# Altium PCB Osiris.PcbDoc
Units mm, origin at the board's own origin, x right, y up, seen from the top; angles counter-clockwise.
Board outline 27.4 x 49.88 mm, 2 copper layers (Top Layer, Bottom Layer), stack 1.671 mm thick; 46 components, 44 nets, 177 pads, 46 vias.
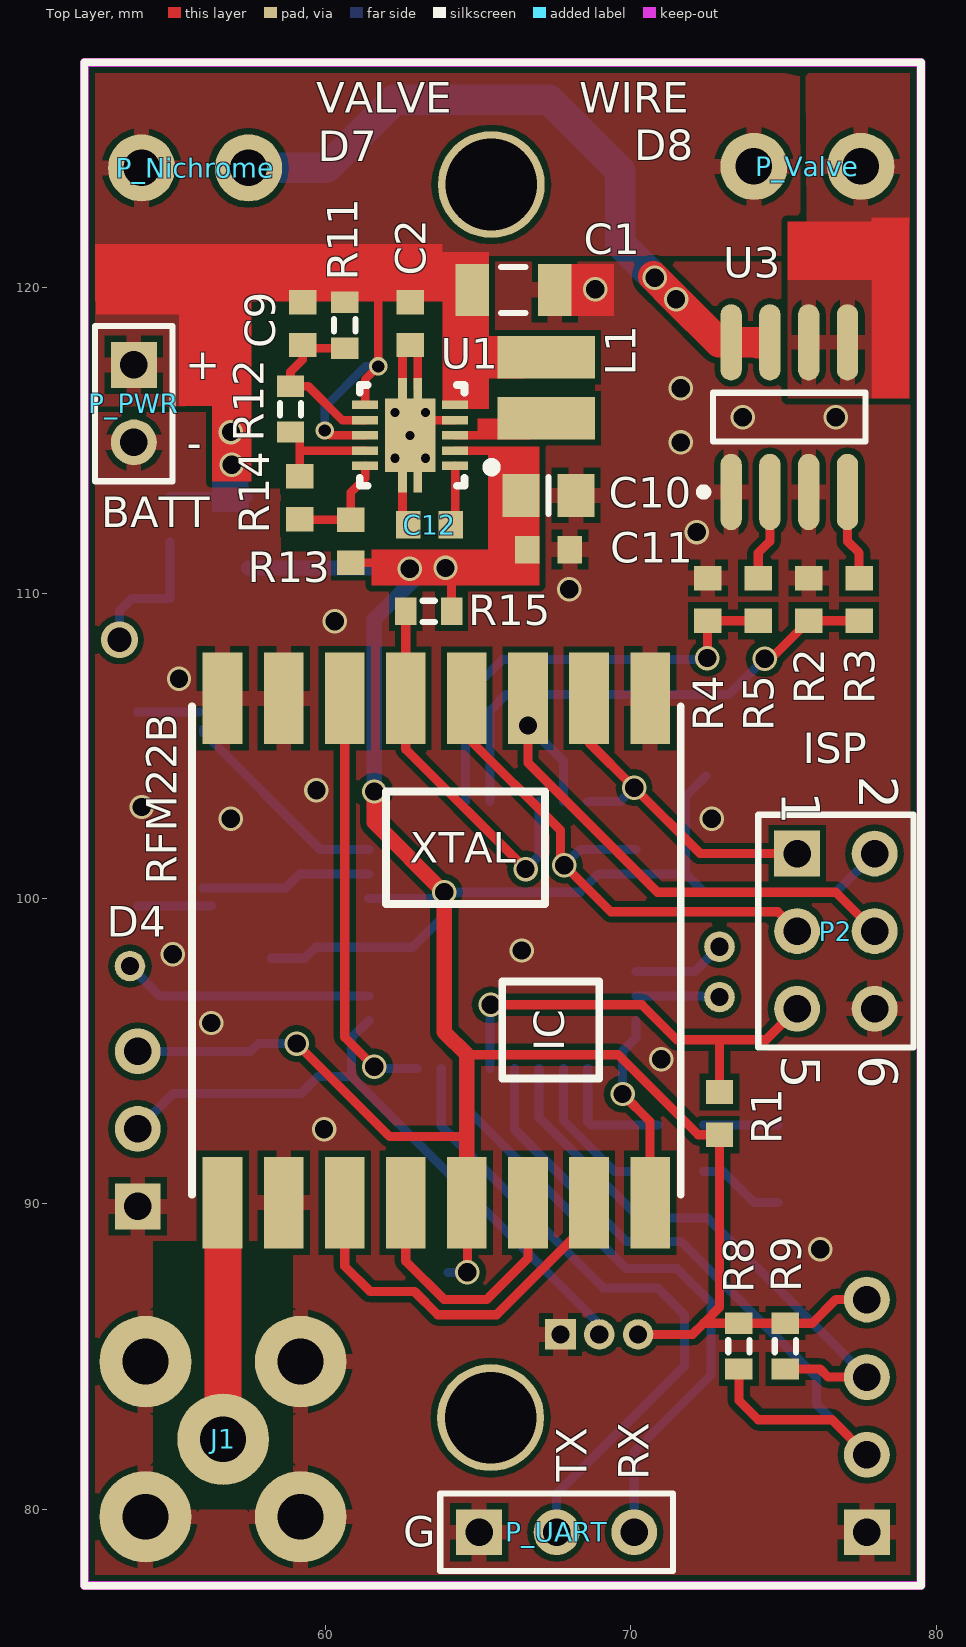
[diagram p0: Top Layer view]
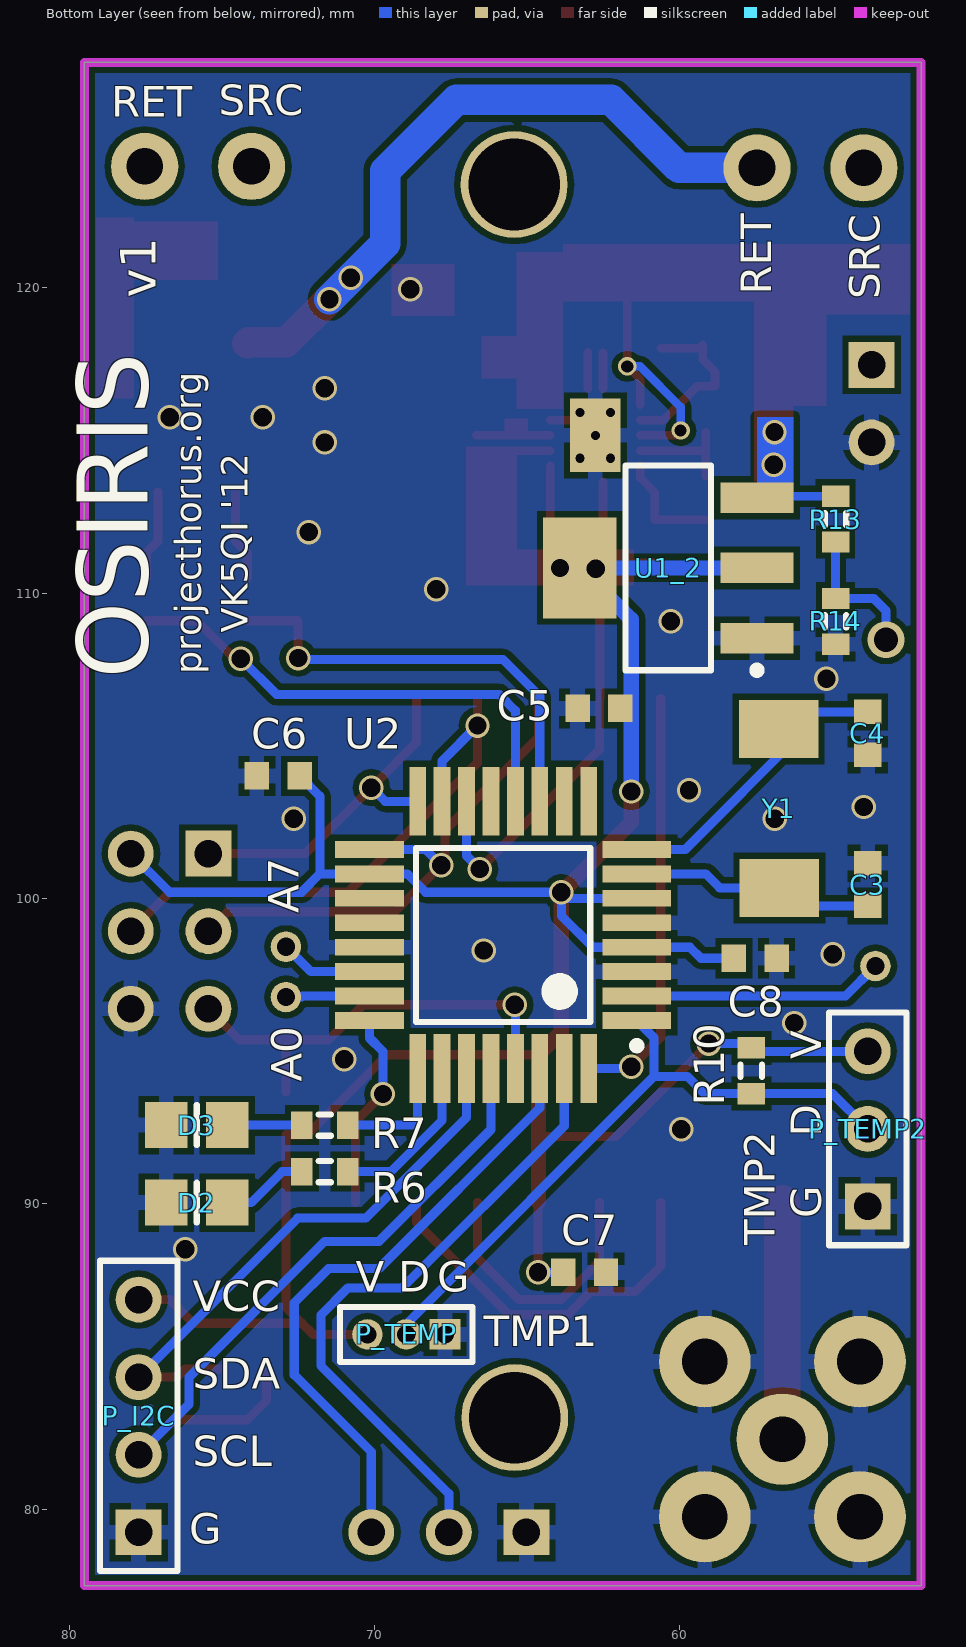
[diagram p1: Bottom Layer view, seen from below]

## Layer stack, top to bottom
Top Layer: signal copper 0.0356
Dielectric: core 1.6, FR-4, Dk 4.8
Bottom Layer: signal copper 0.0356

## Board outline
52.1,77.5 52.1,127.381 79.5,127.381 79.5,77.5

## Design rules (kind name [scope] priority, off if disabled: settings)
Clearance [All] p1: gap=0.2
ComponentClearance [All] p1 off: gap=0.254 collisioncheckmode=3 verticalgap=0.254 showdistances=FALSE
PolygonConnect PolygonConnect_1 [IsVia] p1: connectstyle=Direct reliefconductorwidth=0.254 reliefentries=4 polygonreliefangle="90 Angle"
PolygonConnect [All] p2: connectstyle=Relief reliefconductorwidth=0.5 reliefentries=4 polygonreliefangle="90 Angle"
RoutingVias [All] p1: holewidth=0.6 width=0.8 viastyle="Through Hole" minholewidth=0.711 minwidth=1.27 maxholewidth=0.711 maxwidth=1.27
SilkscreenOverComponentPads [All] p1: minsilkscreentomaskgap=0.254
SolderMaskExpansion [All] p1: expansion=0.102
Width [All] p1: maxlimit=5 minlimit=0.2 preferedwidth=0.2
26 further rules are at their usual default settings.

## Classes and differential pairs
component class Osiris: C1 C2 C3 C4 C5 C6 C7 C8 C9 C10 C11 C12 D1 D2 D3 J1 L1 P2 P_I2C P_Nichrome P_PWR P_TEMP P_TEMP2 P_UART P_Valve R1 R2 R3 R4 R5 R6 R7 R8 R9 R10 R13 R14 R15 U1 U1_2 U2 U3 Y1

## Components (designator, comment, footprint, x,y, rotation, side; value= is the part's Value field where it differs from the comment)
C1 "10V" C1206 66.15,119.925 r180 top
C2 "Cap Semi" 1608[0603] 62.775,118.825 r90 top
C3 "C0805" 1608[0603] 53.848,100.457 r270 bottom
C4 "C0805" 1608[0603] 53.848,105.41 r90 bottom
C5 "Cap Semi" 1608[0603] 62.65,106.225 r180 bottom
C6 "Cap Semi" 1608[0603] 73.152,104.013 r180 bottom
C7 "Cap Semi" 1608[0603] 63.119,87.757 r0 bottom
C8 "Cap Semi" 1608[0603] 57.531,98.044 r0 bottom
C9 "Cap Semi" 1608[0603] 59.25,118.825 r90 top
C10 "6.3V" 6-0805_N 67.3,113.2 r180 top
C11 "Cap Semi" 1608[0603] 67.3,111.425 r180 top
C12 "Cap Semi" 1608[0603] 63.402,112.246 r0 top
D2 "LED0" 6-0805_M 75.819,90.043 r0 bottom
D3 "LED0" 6-0805_M 75.819,92.583 r0 bottom
J1 "SMA_R" "CON SMA PCB 90" 56.642,82.296 r180 top
L1 "ELLVGG2R2N" ELLVGG 67.225,116.725 r90 top
P2 "ISP" HDR2X3 75.438,101.473 r270 top
P_I2C "Header 4" HDR1X4 77.724,79.248 r90 bottom
P_Nichrome "Header 2" MOLEX_Terminal_Block 53.975,123.925 r0 top
P_PWR "Header 2" HDR1X2 53.721,117.475 r270 top
P_TEMP "MHDR1X3" MHDR1X3 67.691,85.725 r0 bottom
P_TEMP2 "Header 3" HDR1X3 53.848,89.916 r90 bottom
P_UART "Header 3" HDR1X3 65.024,79.248 r0 top
P_Valve "Header 2" MOLEX_Terminal_Block 74.025,123.975 r0 top
R1 "Res3" 1608[0603] 72.898,92.964 r270 top
R2 "Res3" 1608[0603] 75.819,109.794 r270 top
R3 "Res3" 1608[0603] 77.47,109.794 r270 top
R4 "Res3" 1608[0603] 72.517,109.794 r90 top
R5 "Res3" 1608[0603] 74.168,109.794 r90 top
R6 "Res3" J1-0603 71.628,91.059 r0 bottom
R7 "Res3" J1-0603 71.628,92.583 r0 bottom
R8 "Res3" J1-0603 73.533,85.344 r270 top
R9 "Res3" J1-0603 75.057,85.344 r270 top
R10 "Res3" J1-0603 57.658,94.361 r270 bottom
R11 "Res3" J1-0603 60.625,118.775 r90 top
R12 "Res3" J1-0603 58.85,116.025 r90 top
R13 "Res3" J1-0603 54.9,112.425 r90 bottom
R13 "Res3" 1608[0603] 60.825,111.7 r270 top
R14 "Res3" J1-0603 54.9,109.075 r270 bottom
R14 "Res3" 1608[0603] 59.15,113.125 r270 top
R15 "Res3" J1-0603 63.375,109.4 r0 top
U1 "TPS61202" TPS61200 62.767,115.167 r270 top
U1_2 "LM1117IMP-3.3" MP04A_N 60.375,110.825 r0 bottom
U2 "ATMega328P" TQFP32 65.786,98.806 r0 bottom
U3 "FDS9926A" SO8_M 75.184,115.763 r90 top
Y1 "8MHz" ABM3_XTAL 56.642,104.648 r270 bottom

## Footprints (in the part's own frame and the unit in brackets; to place one, negate y for a bottom-side part, rotate by r counter-clockwise, add the part's x,y. Pads: shape width x height; smd on the part's side, far side on the other; paste and mask are expansions set on the pad)
6-0805_M [mm] "Chip Resistor, Body 2.0x1.2mm, IPC Low Density"
  rect 1.4x1.5 smd: 1(-1,0) 2(1,0)
  silkscreen extent 0,-0.65 0,0.65, body extent -1.07,-0.7 1.07,0.7, height 0.7
6-0805_N [mm] "Chip Resistor, Body 2.0x1.2mm, IPC Medium Density"
  rect 1.2x1.4 smd: 1(-0.9,0) 2(0.9,0)
  silkscreen extent 0,-0.6 0,0.6, body extent -1.07,-0.7 1.07,0.7, height 0.7
1608[0603] [mm] "Chip Capacitor, Body 1.6x0.8mm, IPC High Density"
  rect 0.8x0.9 smd: 1(-0.7,0) 2(0.7,0)
  body extent -0.87,-0.48 0.87,0.48, height 1.3
ABM3_XTAL [mm]
  rect 1.9x2.6 smd: 1(-0.9,-0.125) 2(4.3,-0.1)
  body extent -1.4,-1.95 4.8,1.75, height 1.34
C1206 [mm] "Chip Capacitor, Body 3.2x1.6mm, IPC High Density"
  rect 1.1x1.7 smd: 1(-1.35,0) 2(1.35,0)
  silkscreen extent -0.4,-0.75 0.4,0.75, body extent -1.7,-0.9 1.7,0.9, height 1.3
"CON SMA PCB 90" [mm] "UofA Lib Pavel"
  round 3 hole 1.5: 1(0,0) 2(-2.54,2.54) 2(-2.54,-2.54) 2(2.54,2.54) 2(2.54,-2.54)
ELLVGG [mm]
  rect 1.4x3.2 smd: 1(1,0) 2(-1,0)
HDR1X2 [mm] "Connector; Header; 2 Position"
  rect 1.5x1.5 hole 0.9: 1(0,0)
  round 1.5 hole 0.9: 2(2.54,0)
  silkscreen extent -1.27,-1.27 3.81,1.27
HDR1X3 [mm] "Connector; Header; 3 Position"
  rect 1.5x1.5 hole 0.9: 1(0,0)
  round 1.5 hole 0.9: 2(2.54,0) 3(5.08,0)
  silkscreen extent -1.27,-1.27 6.35,1.27
HDR1X4 [mm] "Connector; Header; 4 Position"
  rect 1.5x1.5 hole 0.9: 1(0,0)
  round 1.5 hole 0.9: 2(2.54,0) 3(5.08,0) 4(7.62,0)
  silkscreen extent -1.27,-1.27 8.89,1.27
HDR2X3 [mm] "Connector; Header; 3x2 Position"
  rect 1.5x1.5 hole 0.9: 1(0,0)
  round 1.5 hole 0.9: 2(0,2.54) 3(2.54,0) 4(2.54,2.54) 5(5.08,0) 6(5.08,2.54)
  silkscreen extent -1.27,-1.27 6.35,3.81
J1-0603 [mm] "Chip Resistor, Body 1.6x0.8mm, IPC High Density"
  rect 0.7x0.9 smd: 1(-0.75,0) 2(0.75,0)
  silkscreen extent -0.2,-0.35 0.2,0.35, body extent -0.85,-0.48 0.85,0.48, height 0.9
MHDR1X3 [mm] "Connector; Header; 3 Position"
  rect 1x1 hole 0.6: 1(0,0)
  round 1 hole 0.6: 2(1.27,0) 3(2.54,0)
  silkscreen extent -0.9,-0.9 3.44,0.9
MOLEX_Terminal_Block [mm]
  round 2.2 hole 1.2: 1(0,0) 2(3.5,0)
  body extent -1.78,-3.77 5.33,3.52, height 8.51
MP04A_N [mm] "SOT223, 4-Leads, Body 6.5x3.5mm, Pitch 2.3mm, Lead Span 7mm, IPC Medium Density"
  rect 2.4x1 smd: 1(-2.9,2.3) 2(-2.9,0) 3(-2.9,-2.3)
  rect 2.4x3.3 smd: 4(2.9,0)
  silkscreen extent -3.02,-3.35 1.4,3.47, body extent -1.85,-3.35 1.85,3.35, height 1.8
SO8_M [mm] "SOIC, 8-Leads, Body 4.9x3.9mm, Pitch 1.27mm, IPC Low Density"
  oval 2.5x0.7 smd: 1(-2.45,1.905) 2(-2.45,0.635) 3(-2.45,-0.635) 4(-2.45,-1.905) 5(2.45,-1.905) 6(2.45,-0.635) 7(2.45,0.635) 8(2.45,1.905)
  silkscreen extent -2.57,-2.5 0.8,2.93, body extent -2,-2.5 2,2.5, height 1.75
TPS61200 [mm]
  rect 0.7x0.28 smd: 0(-1.524,-0.25) 0(-1.524,0.25) 0(1.524,-0.25) 0(1.524,0.25)
  rect 2.4x1.65 smd: 0(0,0)
  rect 2.4x1.65 smd far side: 0(0,0)
  rect 0.28x0.85 smd: 1(1,1.475) 2(0.5,1.475) 3(0,1.475) 4(-0.5,1.475) 5(-1,1.475) 6(-1,-1.475) 7(-0.5,-1.475) 8(0,-1.475) 9(0.5,-1.475) 10(1,-1.475)
  silkscreen extent -1.65,-1.65 1.65,2.77
TQFP32 [mm] "TQFP, 32-Leads, Body 7.3x9.3mm (max), Pitch 0.80mm, IPC Medium Density"
  rect 2.25x0.55 smd: 1(-4.375,2.8) 2(-4.375,2) 3(-4.375,1.2) 4(-4.375,0.4) 5(-4.375,-0.4) 6(-4.375,-1.2) 7(-4.375,-2) 8(-4.375,-2.8) 17(4.375,-2.8) 18(4.375,-2) 19(4.375,-1.2) 20(4.375,-0.4) 21(4.375,0.4) 22(4.375,1.2) 23(4.375,2) 24(4.375,2.8)
  rect 0.55x2.25 smd: 9(-2.8,-4.375) 10(-2,-4.375) 11(-1.2,-4.375) 12(-0.4,-4.375) 13(0.4,-4.375) 14(1.2,-4.375) 15(2,-4.375) 16(2.8,-4.375) 25(2.8,4.375) 26(2,4.375) 27(1.2,4.375) 28(0.4,4.375) 29(-0.4,4.375) 30(-1.2,4.375) 31(-2,4.375) 32(-2.8,4.375)
  silkscreen extent -4.5,-2.85 2.85,3.75, body extent -3.5,-3.5 3.5,3.5, height 1.2

## Part data
C1 C10: library part "Cap Semi", "Capacitor (Semiconductor SIM Model)"
C2 C5 C6 C7 C8 C9 C11 C12: "Capacitor (Semiconductor SIM Model)"
C3 C4: "Ceramic Chip Capacitor - Standard"
D2 D3: "Typical INFRARED GaAs LED"
J1: "Power Connector"
L1: library part Inductor, "Inductor"
P2: library part "Header 3X2", "Header, 3-Pin, Dual row"
P_I2C: "Header, 4-Pin"
P_Nichrome P_PWR P_Valve: "Header, 2-Pin"
P_TEMP P_TEMP2 P_UART: "Header, 3-Pin"
R1 R2 R3 R4 R5 R6 R7 R8 R9 R10 R11 R12 R13 R13 R14 R14 R15: "Resistor"
U1: library part TPS61200
U1_2: "800mA Low-Dropout Linear Regulator, 4-pin SOT-223"
Y1: library part ECS-110-S-1, "Crystal Oscillator"

## Free pads (board coordinates)
  round 1 hole 0.6: 0(72.898,96.774) 1(72.898,98.425) 2(53.594,97.79)
  rect 1.3x3 smd: 1(56.626,90.043) 2(58.626,90.043) 3(60.626,90.043) 4(62.626,90.043) 5(64.626,90.043) 6(66.626,90.043) 7(68.626,90.043) 8(70.626,90.043) 9(70.626,106.553) 10(68.626,106.553) 11(66.626,106.553) 12(64.626,106.553) 13(62.626,106.553) 14(60.626,106.553) 15(58.626,106.553) 16(56.626,106.553)
  round 3.5 hole 3: 3(65.405,83) 3(65.425,123.381)

## Via types
v1: diameter 0.8, hole 0.6, Top Layer to Bottom Layer, tented both sides, 35 vias
v2: diameter 0.4, hole 0.3, Top Layer to Bottom Layer, 5 vias
v3: diameter 0.8, hole 0.6, Top Layer to Bottom Layer, 2 vias
v4: diameter 0.6, hole 0.4, Top Layer to Bottom Layer, tented both sides, 2 vias
v5: diameter 1.2, hole 0.8, Top Layer to Bottom Layer, 1 vias
v6: diameter 0.8, hole 0.6, Top Layer to Bottom Layer, tented bottom, 1 vias

## Nets (pads, with @x,y where several pads share a name; then routed paths per layer and width w, separated by ;. In a path a pad name is that pad's centre, name@x,y a point inside that pad or via, vN(x,y) a via of type N, cw(c..) or ccw(c..) an arc to the next point about the centre after c; other vN are vias at no path point)
ADC6: U2.19
ADC7: pad.1@72.898,98.425 U2.22 | length 3.1
  Bottom Layer w0.3: U2.22 72.079,97.606 pad.1@72.898,98.425
GND: C1.1 C2.1 C3.1 C4.1 C5.1 C6.1 C7.1 C8.1 C10.1 C11.1 C12.1 D2.2 D3.2 J1.2 P2.6 P_I2C.1 P_PWR.2 P_TEMP2.1 P_TEMP.1 P_UART.1 pad.2@58.626,90.043 pad.9 pad.15 pad.16 R2.1 R4.2 R14.2@54.9,108.325 U1.0 U1.4 U1_2.1 U2.3 U2.5 U2.21 U3.1 U3.3 | length 4.6
  Top Layer w0.28: C12.1@62.517,112.431 U1.0@62.517,113.643 ; U1.0@62.517,116.691 C2.1@62.517,117.867 ; U1.0@63.017,116.691 C2.1@63.017,117.883 ; U1.0@63.267,115.667 U1.4
  other v1: 76.2,88.519 59.95,92.45 70.993,94.742 56.25,95.925 54.991,98.171 66.421,98.298 56.896,102.616 72.644,102.616 53.975,102.997 59.7,103.55 55.2,107.2 60.3,109.075 67.975,110.125 72.15,112 71.628,114.935 73.66,115.763 76.708,115.763 71.628,116.713 68.825,119.95
  other v2: 62.267,114.417 63.267,114.417 62.767,115.167 62.267,115.917 63.267,115.917
NetC9_1: C9.1 R11.1 R12.2 U1.7 | length 5.8
  Top Layer w0.28: R11.1 59.35,118.025 C9.1 59.25,117.65 58.85,117.25 R12.2 59.43,116.775 60.538,115.667 U1.7
NetC12_2: C12.2 U1.1 | length 1.8
  Top Layer w0.28: C12.2@64.242,112.386 U1.1
NetD2_1: D2.1 R6.2 | length 2.9
  Bottom Layer w0.3: R6.2 73.025,91.059 74.041,90.043 D2.1
NetD3_1: D3.1 R7.2 | length 2.4
  Bottom Layer w0.3: R7.2 D3.1
NetJ1_1: J1.1 pad.1@56.626,90.043 | length 7.8
  Top Layer w1: pad.1@56.626,90.043 pad.1@56.642,90.027
  Top Layer w1.2: J1.1 pad.1@56.642,90.027
NetL1_2: L1.2 U1.3 | length 2.4
  Top Layer w0.28: U1.3 L1.2@66.667,115.167
NetP_Nichrome_2: P_Nichrome.2 U3.7 U3.8 | length 23.4
  Top Layer w1: v1@70.725,120.375 v1(71.475,119.625) 72.887,118.213 U3.8 74.131,118.213 74.168,118.176
  Bottom Layer w1: P_Nichrome.2 60.025,123.925 62.25,126.15 67.325,126.15 69.65,123.825 69.65,121.45 v1(71.475,119.625)
  other v1: 70.775,120.325
NetP_Valve_2: P_Valve.2 U3.5 U3.6
NetR3_1: R3.1 U3.4 | length 3
  Top Layer w0.3: U3.4 77.089,111.699 77.47,111.318 R3.1
NetR5_2: R5.2 U3.2 | length 3
  Top Layer w0.3: R5.2 74.168,111.318 74.549,111.699 U3.2
NetR12_1: R12.1 R14.1@59.15,113.825 U1.9 | length 3.6
  Top Layer w0.28: R14.1@59.15,113.825 R12.1@59.15,115.275 ; 59.183,114.667 U1.9
NetR13_1: R13.1@54.9,111.675 R14.1@54.9,109.825 | length 4.6
  Bottom Layer w0.3: v5(53.25,108.475) 53.25,109.425 53.65,109.825 54.9,109.825 R13.1@54.9,111.675
NetR13_1: R13.1@60.825,112.4 R14.2@59.15,112.425 U1.10 | length 3.6
  Top Layer w0.28: R14.2@59.175,112.4 60.825,112.4 60.825,113.3 61.292,113.767 U1.10
NetU5_3: pad.3@60.626,90.043 pad.7 | length 12.6
  Top Layer w0.3: pad.3@60.626,90.043 60.626,87.964 61.46,87.13 62.912,87.13 63.674,86.368 65.596,86.368 68.626,89.398 pad.7
NetU5_4: pad.4 pad.6 | length 8.8
  Top Layer w0.3: pad.4 62.626,88.123 63.881,86.868 65.278,86.868 66.626,88.216 pad.6
PB0: R2.2 R3.2 U2.12 | length 16.3
  Top Layer w0.3: v1(74.375,107.85) 74.575,107.85 R2.2 R3.2
  Bottom Layer w0.3: U2.12 65.386,106.153 65.913,106.68 73.205,106.68 v1(74.375,107.85)
PB1: U2.13
PB2: pad.13 R15.1 U2.14 | length 12.5
  Top Layer w0.3: R15.1 pad.13 pad.13 62.626,104.887 v1(66.548,100.965)
  Bottom Layer w0.3: v1(66.548,100.965) 66.986,101.403 U2.14
PB3/MOSI: P2.4 pad.11 U2.15 | length 18.7
  Top Layer w0.3: pad.11 v6(66.626,105.664) 66.626,104.443 70.866,100.203 76.708,100.203 P2.4
  Bottom Layer w0.3: v6(66.626,105.664) 67.786,104.504 U2.15
PB4/MISO: P2.1 pad.10 U2.16 | length 11.5
  Top Layer w0.3: pad.10 68.626,105.11 v1(70.104,103.632) 72.263,101.473 P2.1
  Bottom Layer w0.3: U2.16 69.653,103.181 v1(70.104,103.632)
PB5/SCK: P2.3 pad.12 U2.17 | length 17.9
  Top Layer w0.3: pad.12 64.626,105.3 67.691,102.235 67.691,101.219 v1(67.818,101.092) 69.342,99.568 74.803,99.568 P2.3
  Bottom Layer w0.3: v1(67.818,101.092) 68.326,101.6 70.155,101.6 U2.17 U2.17@70.167,101.6
PC0: pad.0 U2.23 | length 2.2
  Bottom Layer w0.3: U2.23 72.358,96.806 72.39,96.774
PC1: pad.8 U2.24 | length 6.5
  Top Layer w0.3: v1(69.723,93.599) 70.626,92.696 pad.8
  Bottom Layer w0.3: v1(69.723,93.599) 69.723,94.996 70.161,95.434 U2.24
PC2: R7.1 U2.25 | length 4.1
  Bottom Layer w0.3: U2.25 68.586,92.704 68.707,92.583 R7.1
PC3: R6.1 U2.26 | length 5.5
  Bottom Layer w0.3: U2.26 67.786,92.742 69.469,91.059 R6.1
PC4: P_I2C.3 R9.2 U2.27 | length 18.6
  Top Layer w0.3: R9.2 76.188,84.594 76.454,84.328 P_I2C.3
  Bottom Layer w0.3: U2.27 66.984,94.429 66.984,92.837 70.286,89.535 72.517,89.535 P_I2C.3
PC5: P_I2C.2 R8.2 U2.28 | length 24.4
  Top Layer w0.3: R8.2 73.533,83.566 74.168,82.931 76.581,82.931 P_I2C.2
  Bottom Layer w0.3: U2.28 66.186,92.437 69.85,88.773 71.628,88.773 76.073,84.328 76.073,83.439 P_I2C.2
PD0: P_UART.3 U2.30 | length 20.5
  Bottom Layer w0.3: U2.30 64.586,93.148 69.85,87.884 71.501,87.884 72.625,86.76 72.625,84.4 70.104,81.879 P_UART.3
PD1: P_UART.2 U2.31 | length 21.3
  Bottom Layer w0.3: U2.31 63.786,92.551 69.088,87.249 70.866,87.249 71.755,86.36 71.755,84.705 67.564,80.514 P_UART.2
PD2: pad.14 U2.32 | length 13.9
  Top Layer w0.3: pad.14 60.626,95.457 v1(61.595,94.488)
  Bottom Layer w0.3: v1(61.595,94.488) 61.652,94.431 U2.32
PD3: P_TEMP2.2 P_TEMP.2 R10.2 U2.1 | length 21.6
  Bottom Layer w0.3: P_TEMP2.2 55.003,93.611 58.42,93.611 59.194,93.611 59.76,94.177 60.845,94.177 ; U2.1 60.845,95.44 60.845,94.177 ; P_TEMP.2 68.961,86.061 60.845,94.177
PD4: pad.2@53.594,97.79 U2.2 | length 8.2
  Bottom Layer w0.3: pad.2@53.594,97.79 54.578,96.806 U2.2
PD5: U2.9
PD6: U2.10
PD7: R4.1 R5.1 U2.11 | length 14.7
  Top Layer w0.3: v1(72.5,107.875) 72.5,109.077 R4.1 R5.1
  Bottom Layer w0.3: U2.11 64.586,106.623 65.786,107.823 v1@72.448,107.823
RST: P2.5 R1.1 U2.29 | length 14.7
  Top Layer w0.3: v1(65.405,96.52) 70.358,96.52 71.501,95.377 72.898,95.377 ; R1.1 72.898,95.377 ; P2.5 74.422,95.377 72.898,95.377
  Bottom Layer w0.3: U2.29 65.386,96.501 v1(65.405,96.52)
V_BATT: C1.2 C2.2 C9.2 L1.1 P_Nichrome.1 P_PWR.1 P_Valve.1 R11.2 R13.2@54.9,113.175 U1.5 U1.6 U1.8 U1_2.3 | length 10.9
  Top Layer w0.28: v4(59.975,115.325) 60.133,115.167 U1.8 ; U1.6 61.292,116.992 v4(61.725,117.425) 61.725,119.8
  Bottom Layer w0.28: R13.2@54.9,113.175 57.425,113.175 U1_2.3 ; v4(59.975,115.325) 59.975,116.1 61.3,117.425 v4(61.725,117.425)
  other v1: 56.925,114.2 56.9,115.275
V_REF: U2.20
VCC: C5.2 C6.2 C7.2 C8.2 C10.2 C11.2 P2.2 P_I2C.4 P_TEMP2.3 P_TEMP.3 pad.5 R1.2 R8.1 R9.1 R10.1 R13.2@60.825,111 R15.2 U1.2 U1_2.2 U1_2.4 U2.4 U2.6 U2.18 | length 99.2
  Top Layer w0.28: R13.2@60.825,111 62.15,111 ; U1.2 65.492,114.667
  Top Layer w0.3: v1(59.055,95.25) 62.103,92.202 64.626,92.202 64.688,92.264 ; R15.2 64.125,110.475 ; pad.5 64.643,90.026 v1(64.643,87.757) ; 64.626,94.886 69.579,94.886 72.201,92.264 R1.2 72.898,86.614 72.378,86.094 ; P_TEMP.3 72.009,85.725 72.378,86.094 ; P_I2C.4 76.708,86.868 75.934,86.094 R9.1 R8.1 72.378,86.094
  Top Layer w0.5: v1(61.595,103.505) 61.595,102.489 v1(63.881,100.203) 63.881,95.631 64.626,94.886 64.626,92.202 pad.5
  Bottom Layer w0.3: P_TEMP2.3 57.543,94.996 R10.1 57.797,95.25 v1(59.055,95.25) ; C8.2 59.309,98.044 59.671,98.406 U2.4 62.846,98.406 63.881,99.441 v1(63.881,100.203) ; U2.6 63.684,100.006 v1(63.881,100.203) ; C7.2@64.008,87.757 v1(64.643,87.757) ; C6.2 71.787,103.348 71.787,100.806 ; P2.2 76.708,100.203 73.025,100.203 72.39,100.203 71.787,100.806 ; v1(63.881,100.203) 68.326,100.203 68.929,100.806 U2.18 71.787,100.806
  Bottom Layer w0.5: U1_2.2 U1_2.4 61.595,109.145 v1(61.595,103.505)
  other v3: 62.75,110.8 63.925,110.825
XTAL1: C3.2 U2.7 Y1.2 | length 8
  Bottom Layer w0.3: C3.2 Y1.2@56.261,99.757 ; Y1.2@55.98,100.348 58.692,100.348 59.15,100.806 U2.7
XTAL2: C4.2 U2.8 Y1.1 | length 9.1
  Bottom Layer w0.3: C4.2 Y1.1@55.88,106.11 ; Y1.1@56.005,105.548 56.005,105.424 59.823,101.606 U2.8

## Polygon pours and split planes (outlines as drawn)
GND on Bottom Layer "Top Layer-No Net" (solid, pour order 17): 79.5,127.381 52.1,127.381 52.1,77.594 52.1,77.5 79.5,77.5
GND on Top Layer "Top Layer-No Net" (solid, pour order 15): 52.1,127.381 52.1,77.5 79.5,77.5 79.5,127.381
V_BATT on Top Layer "Top Layer-No Net 1" (solid, pour order 9): 52.45,121.05 52.45,121.505 52.45,122.847 52.45,127.381 75.844,127.381 75.85,127.375 75.85,123.134 75.85,121.05
V_BATT on Top Layer "Top Layer-No Net 1" (solid, pour order 10): 52.3,116.125 52.3,119.125 55.4,119.125 55.4,116.125
NetP_Valve_2 on Top Layer "Top Layer-No Net 1" (solid, pour order 7): 75.125,116.375 75.125,120.25 77.875,120.25 77.875,116.375
NetP_Valve_2 on Top Layer "Top Layer-No Net 1" (solid, pour order 8): 75.725,127.125 79.125,127.125 79.125,122.125 75.75,122.125

## Keep-outs
Keep-Out Layer:
  the board outline again, w0.3

## Other copper
Top Layer:
  rectangle net NetP_Valve_2: 75.125,120.25 78.1,122.175
  rectangle net NetP_Valve_2: 77.875,116.375 79.125,122.3
  rectangle net GND: 67.375,119.075 69.45,120.775
  rectangle net V_BATT: 52.457,119.125 56.075,120.65
  rectangle net V_BATT: 56.275,113.65 57.575,116.2
  rectangle net VCC: 61.5,110.25 65.475,111.425
  rectangle net VCC: 65.325,110.25 67,114.8
  rectangle net NetL1_2: 64.975,115.025 65.75,115.725
  rectangle net V_BATT: 55.2,116.125 57.575,119.65
  rectangle net V_BATT: 52.45,119.55 63.825,121.425
  rectangle net V_BATT: 64.675,117.025 66.5,118.425
  rectangle net V_BATT: 63.825,116.025 65.35,121.175
  pour cut-out: 57.575,113.446 57.596,113.425 61.8,113.425 61.8,119.25 61.65,119.4 57.55,119.4
  pour cut-out: 58.525,111.35 58.525,114.9 64.275,114.9 64.4,114.775 64.4,111.35
  pour cut-out: 65.625,116.425 65.625,117.025 68.825,117.025 68.825,116.425
  pour cut-out: 54.352,80.006 54.356,80.01 54.356,88.773 58.928,88.773 58.932,88.769 58.932,80.006
Bottom Layer:
  rectangle net V_BATT: 56.275,112.65 57.475,115.775
  pour cut-out: 71.501,89.535 72.517,89.535 77.216,84.963 77.231,82.662 77.47,82.423 76.962,82.423 76.962,82.55 76.073,83.439 76.073,84.328 71.628,88.773
  pour cut-out: 61.931,93.091 61.988,93.148 64.586,93.148 69.85,87.884 71.501,87.884 72.816,86.569 68.453,86.569

## Silkscreen, mask and mechanical layers (free items; w line width, h text height)
Top Overlay:
  lines w0.254: 55.626,90.297 55.626,106.297 ; 71.626,90.297 71.626,106.297 ; 52.1,77.5 79.5,77.5 79.5,127.381 52.1,127.381 52.1,77.5 ; 61.976,99.822 61.976,103.505 67.183,103.505 67.183,99.822 61.976,99.822 ; 65.786,94.107 65.786,97.282 68.961,97.282 68.961,94.107 65.786,94.107
  text "VALVE" at 59.7,125.725 h1
  text "WIRE" at 68.3,125.725 h1
  text "D8" at 70.1,124.175 h1
  text "D7" at 59.75,124.15 h1
  text "+" at 55.4,117 h1
  text "-" at 55.45,114.425 h1
  text "BATT" at 52.65,112.15 h1
  text "ISP" at 75.625,104.425 h1
  text "XTAL" at 62.75,101.175 h1
  text "RFM22B" at 55.118,100.457 h1 r90
  text "D4" at 52.825,98.75 h1
  text "IC" at 67.818,94.996 h1 r90
  text "RX" at 70.575,80.95 h1 r90
  text "TX" at 68.55,80.9 h1 r90
  text "G" at 62.55,78.775 h1
Bottom Overlay:
  text "SRC" at 75.1,125.65 h1
  text "RET" at 78.625,125.6 h1
  text "RET" at 57,119.775 h1 r270
  text "v1" at 76.775,119.675 h2 r270
  text "SRC" at 53.45,119.625 h1 r270
  text "VK5QI '12" at 73.85,108.7 h1.5 r270
  text "projecthorus.org" at 75.375,107.35 h1.5 r270
  text "OSIRIS" at 76.65,107.2 h4 r270
  text "A7" at 72.475,99.525 h1 r270
  text "V" at 55.372,94.742 h1 r270
  text "A0" at 72.375,94 h1 r270
  text "D" at 55.372,92.202 h1 r270
  text "G" at 55.372,89.535 h1 r270
  text "TMP2" at 56.896,88.646 h1 r270
  text "G" at 67.945,87.122 h1
  text "D" at 69.215,87.122 h1
  text "V" at 70.612,87.122 h1
  text "VCC" at 75.946,86.487 h1
  text "TMP1" at 66.421,85.344 h1
  text "SDA" at 75.946,83.947 h1
  text "SCL" at 75.946,81.407 h1
  text "G" at 76.073,78.867 h1
Drill Drawing:
  text ".LEGEND" at 85.88,81.28 h1.52
  text "Drill Drawing." at 85.88,78.74 h1.52

## Dimensions
52.1,77.5 to 79.5,77.5 on Mechanical 1
52.1,77.5 to 52.1,127.381 on Mechanical 1

## Text inside footprints (layer, text, board x,y; h text height)
P2: Top Overlay "1" at 74.93,103.505 h1.27 r270; Top Overlay "2" at 77.47,104.013 h1.27 r270; Top Overlay "5" at 74.93,94.869 h1.27 r270; Top Overlay "6" at 77.47,94.869 h1.27 r270